# Altium PCB Rectifer.PcbDoc
Units mil, origin at the board's own origin, x right, y up, seen from the top; angles counter-clockwise.
Board outline 5250.03 x 3710.82 mil, 2 copper layers (Top Layer, Bottom Layer); 37 components, 30 nets, 104 pads, 5 vias.
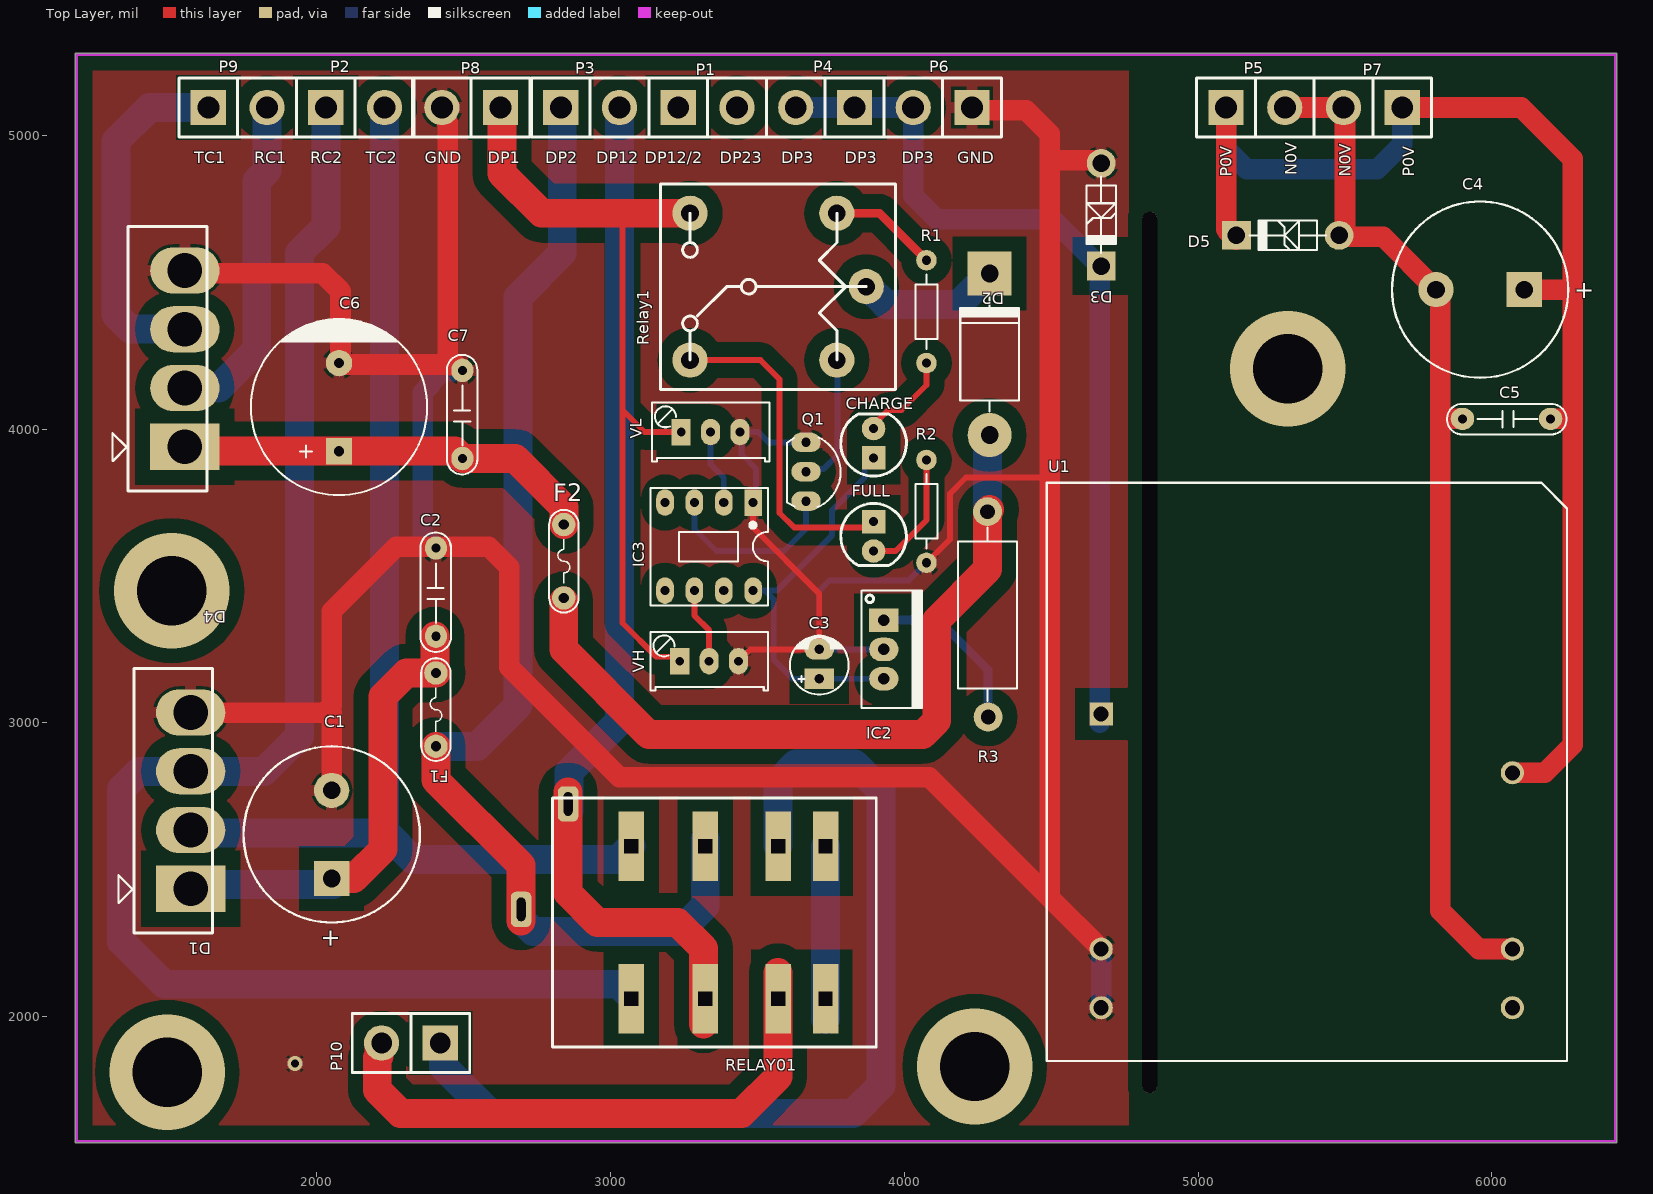
[diagram p0: Top Layer view]
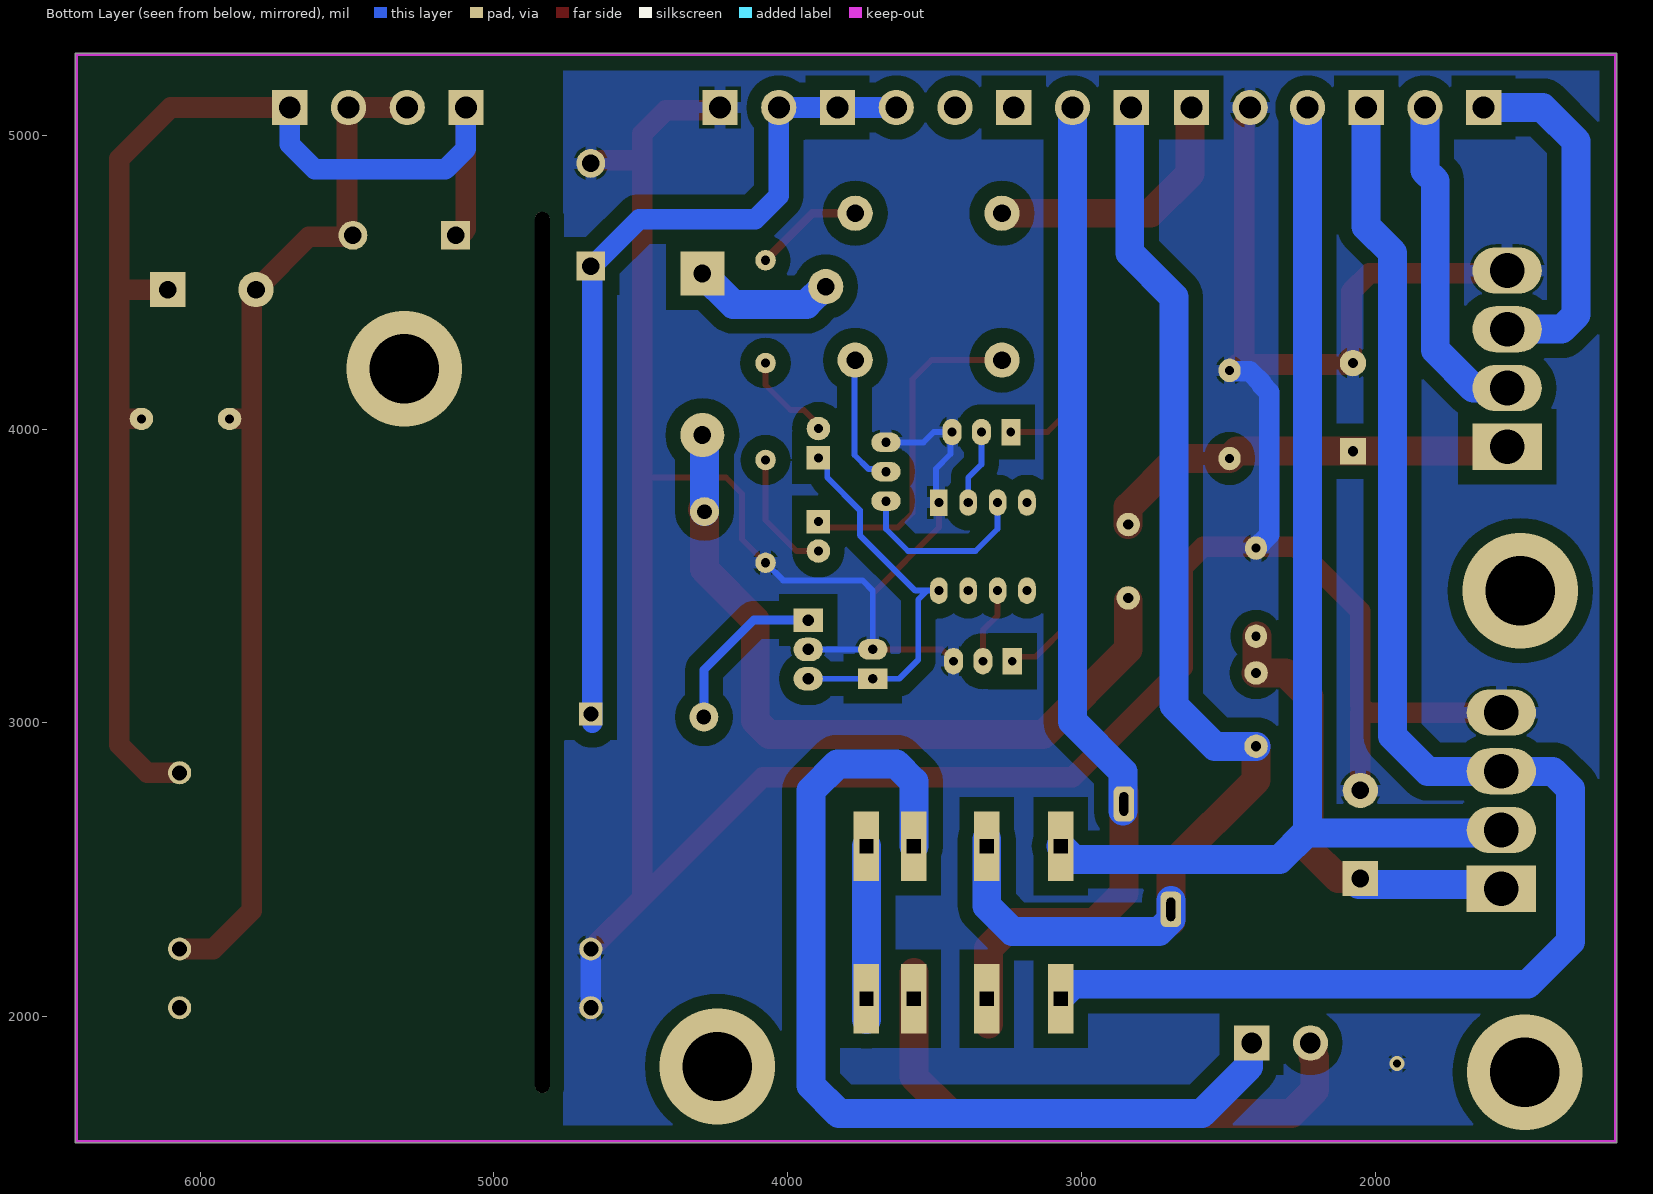
[diagram p1: Bottom Layer view, seen from below]

## Layer stack, top to bottom
Top Solder: solder mask 0.4, Solder Resist, Dk 3.5
Top Layer: signal copper 1.4
Dielectric 1: dielectric 12.6, FR-4, Dk 4.8
Bottom Layer: signal copper 1.4
Bottom Solder: solder mask 0.4, Solder Resist, Dk 3.5

## Board outline
1181.1,1569.79 cw(c1181.1,1574.8) 1176.09,1574.8 1176.09,5275.59 cw(c1181.1,5275.59) 1181.1,5280.61 6417.32,5280.61 cw(c6417.32,5275.59) 6419.21,5280.24 cw(c6421.1,5275.59) 6426.12,5275.59 6426.12,1574.8 cw(c6421.1,1574.8) 6419.21,1570.16 cw(c6417.32,1574.8) 6417.32,1569.79

## Design rules (kind name [scope] priority, off if disabled: settings)
Clearance [All] p1: gap=50 ignorepadtopadclearanceinfootprint=FALSE
PlaneConnect [All] p1: planeconnectstyle=Relief reliefexpansion=20 reliefentries=4 reliefconductorwidth=39.37 reliefairgap=10
PolygonConnect [All] p1: connectstyle=Relief reliefconductorwidth=39.37 reliefentries=4 polygonreliefangle="90 Angle" airgapwidth=10
RoutingVias [All] p1: holewidth=28 width=50 viastyle="Through Hole" minholewidth=28 minwidth=50 maxholewidth=28 maxwidth=50
SolderMaskExpansion [All] p1: expansion=4 istentingtop=FALSE
Width [All] p1: maxlimit=100 minlimit=10 preferedwidth=30
29 further rules are at their usual default settings.

## Components (designator, comment, footprint, x,y, rotation, side; value= is the part's Value field where it differs from the comment)
C1 "1000uF/25" RB7.6-15 2050,2620 r270 top value=100pF
C2 "104" CN3 2405,3445 r270 top value=0,047uF
C3 "10uF" CP1/2 3710,3150 r90 top value=10uF/50V
C4 "1000uF/25" RB7.6-15 5960,4475 r0 top value=100pF
C5 "104" CN3 6050,4035 r0 top value=0,047uF
C6 "1000uF/25" CP3/7 2075,3925 r90 top value=100pF
C7 "104" CN3 2495,4050 r270 top value=0,047uF
CHARGE "SAC" "Led don" 3895,3902 r90 top (schematic designator Led1)
D1 "Bridge2" KBU1010 1570,2435 r270 top
D2 "1N5408" D5A 4290,4530 r270 top
D3 "D Zener" DZ1A 4670,4905 r90 top
D4 "Bridge2" KBU1010 1550,3940 r270 top
D5 "15V" DZ1A 5480,4660 r0 top
F1 "F1A" Fuse 2405,3169 r270 top value=Fuse
F2 "F2A" Fuse 2840.46,3674.27 r270 top value=Fuse
FULL "FULL" "Led don" 3895,3685 r270 top (schematic designator Led2)
IC2 "LM7812" QTO-220 3930,3350 r270 top value=LM7805
IC3 "LM555" DIP8/W0.3 3485,3750 r180 top
P1 "Header 2" "CON2 5.08"#1 3230,5095 r0 top
P2 "Header 2" "CON2 5.08"#1 2030,5095 r0 top
P3 "Header 2" "CON2 5.08"#1 2830,5095 r0 top
P4 "Header 2" "CON2 5.08"#1 3830,5095 r180 top
P5 "Header 2" "CON2 5.08"#1 5095,5095 r0 top
P6 "Header 2" "CON2 5.08"#1 4230,5095 r180 top
P7 "Header 2" "CON2 5.08"#1 5695,5095 r180 top
P8 "Header 2" "CON2 5.08"#1 2625,5095 r180 top
P9 "Header 2" "CON2 5.08"#1 1630,5095 r0 top
P10 "Header 2" "CON2 5.08"#2 2420,1910 r180 top
Q1 "C2383" QTO-92 3665,3855 r270 top value=C1815
R1 "100" R1/4W 4075,4575 r270 top value="R1/4W - 1K"
R2 "2K" R1/4W 4075,3545 r90 top value="R1/4W - 1K"
R3 "5/2W" R2W 4283,3719 r270 top value="R2W - 47"
RELAY01 "DPDT 8 Pin Terminals Relay" "DPDT 8 Pin Terminals Relay" 3070,2060.32 r270 top
Relay1 "relay" Relay1 3770,4735 r270 top
U1 "PP15" PP15 4670,3030 r0 top
VH "10K" VR1 3235,3210 r0 top value="VR 10K"
VL "10K" VR1 3240,3990 r0 top value="VR 10K"

## Footprints (in the part's own frame and the unit in brackets; to place one, negate y for a bottom-side part, rotate by r counter-clockwise, add the part's x,y. Pads: shape width x height; smd on the part's side, far side on the other; paste and mask are expansions set on the pad)
CN3 [mil] "Cap np W 0.3"
  oval 80x75 hole 31: 1(-150,0) 2(150,0)
  silkscreen extent -203,-53 204,51, body extent -158,-40 158,54, height 419
"CON2 5.08"#1 [mil]
  rect 120x120 hole 74.8: 1(0,0)
  round 120 hole 74.8: 2(200,0)
  silkscreen extent -100,-100 300,100
"CON2 5.08"#2 [mil]
  rect 120x120 hole 70: 1(0,0)
  round 120 hole 70: 2(200,0)
  silkscreen extent -100,-100 300,100
CP1/2 [mil] "Tu hoa < 22uF/16>50V"
  rect 70x100 hole 32: 1(0,0)
  oval 70x100 hole 32: 2(100,0)
  silkscreen extent -53,-100 146,100, body extent -49,-99 149,99, height 287
CP3/7 [mil] "Tu hoa 4700uF/25V"
  rect 90x90 hole 35: 1(0,0)
  round 90 hole 35: 2(300,0)
  silkscreen extent -150,-300 450,300
D5A [mil] "Diode 5A, W 200mil, L 550mil"
  round 150 hole 60: 1(550,0)
  rect 150x150 hole 60: 2(0,0)
  silkscreen extent 80,-100 470,100, body extent -52,-106 590,103, height 254
DIP8/W0.3 [mil] "8 PIN, W 300mil, Pin to pin 100mil"
  rect 60x90 hole 31: 1(0,0)
  oval 60x90 hole 31: 2(100,0) 3(200,0) 4(300,0) 5(300,300) 6(200,300) 7(100,300) 8(0,300)
  silkscreen extent -50,-50 350,350, body extent -50,-40 350,336, height 201
"DPDT 8 Pin Terminals Relay" [mm]
  rect 6x2.2 hole 1.2 square: 1(0,0) 2(0,6.4) 3(0,12.7) 4(0,16.8) 5(-13.2,16.8) 6(-13.2,12.7) 7(-13.2,6.4) 8(-13.2,0)
  silkscreen extent -17.37,-6.8 4.15,21.18, body extent -17.37,-6.83 4.15,21.18, height 35
DZ1A [mm] "Diode 1A, W 100mil, L 350mil"
  round 2.5 hole 1.5: 1(0,0)
  rect 2.5x2.5 hole 1.5: 2(-8.89,0)
  silkscreen extent -7.75,-1.27 -1.14,1.27, body extent -8.79,-1.65 -0.38,1.02, height 3.06
Fuse [mil]
  round 80 hole 35: 1(-1,0) 2(249,0)
  silkscreen extent -51,-50 299,50
KBU1010 [mm] "Bridge rectifier 10A"
  rect 4x6 hole 3: 1(0,0)
  oval 4x6 hole 3: 2(-5.08,0) 3(-10.16,0) 4(-15.24,0)
  silkscreen extent -19.05,-6.25 3.81,1.9, body extent -19.05,-4.9 3.84,1.91, height 19
"Led don" [mil] "led don"
  rect 80x80 hole 30: 1(0,0)
  round 80 hole 30: 2(100,0)
  silkscreen extent -62,-112 150,112
PP15 [mm]
  rect 2x2 hole 1.3: 1(0,0)
  round 2 hole 1.3: 2(0,-20.32) 3(0,-25.4) 4(35.56,-25.4) 5(35.56,-20.32) 6(35.56,-5.08)
  silkscreen extent -4.72,-30 40.28,20, body extent -4.14,-29.91 40.92,20.05, height 8
QTO-92 [mil] "TO-92"
  oval 66x100 hole 32: 1(-100,0) 2(0,0) 3(100,0)
  silkscreen extent -117,-65 120,118, body extent -109,-66 109,95, height 245
QTO-220 [mil] "TO-220 - 1-2-3"
  rect 80x100 hole 39: 1(0,0)
  oval 80x100 hole 39: 2(100,0) 3(200,0)
  silkscreen extent -100,-76 300,130, body extent -119,-64 322,121, height 755
R1/4W [mil] "R 1/4W, 2 Pin, 350mil"
  round 70 hole 31: 1(0,0) 2(350,0)
  silkscreen extent 48,-38 302,38, body extent -40,-47 386,47, height 111
R2W [mm] "R2W, 2 pin, 700mil"
  round 2.5 hole 1.27: 1(0,0) 2(17.755,0.051)
  silkscreen extent 1.37,-2.57 16.38,2.54, body extent -2.36,-3.33 19.84,3.27, height 8.3
RB7.6-15 [mil] "Polarized Capacitor (Radial); 2 Leads"
  rect 120x120 hole 60: 1(150,0)
  round 120 hole 60: 2(-150,0)
  silkscreen extent -300,-300 300,300
Relay1 [mil]
  round 120 hole 60: 1(250,100) 2(500,-500) 3(0,-500) 4(0,0) 5(500,0)
  silkscreen extent -100,-600 600,200
VR1 [mil] "Variable Resistor"
  rect 65x90 hole 30: 1(0,0)
  oval 65x90 hole 30: 2(100,0) 3(200,0)
  silkscreen extent -100,-100 301,100, body extent -88,-130 287,110, height 455

## Part data
C1 C4 C6: library part "Cap Pol1", "Polarized Capacitor (Radial)", LatestRevisionDate=17-Jul-2002, LatestRevisionNote="Re-released for DXP Platform.", PackageDescription="Polarized Capacitor (Radial); 2 Leads", PackageReference=RB7.6-15, Published=8-Jun-2000, Publisher="Altium Limited"
C2 C5 C7: library part CN3, "Cap np W0.3", Copyright=VanDungEvn
C3: library part CAP-HOA, "Cap P  0,1uF < 22uF , 16 - 50V", Description 1="10 => 220uF/6,3V/10V - 10uF => 100uF/16V", Description 2="0,1uF => 33uF/50V - 10uF => 22uF/63V", Description 3="0,47uF => 10uF/100V"
CHARGE FULL: library part "led don"
D1 D4: "Diode Bridge", LatestRevisionDate=17-Jul-2002, LatestRevisionNote="Re-released for DXP Platform.", PackageDescription="Bridge Rectifier; 4 Terminals; Body 16.8 x 16.8 mm (typ); Pitch 10.67 mm", PackageReference=D-46_6A, Published=24-Mar-1999, Publisher="Altium Limited"
D2: library part D5A, "Diode 5A"
D3: "Zener Diode", LatestRevisionDate=17-Jul-2002, LatestRevisionNote="Re-released for DXP Platform.", PackageDescription="Diode, Thru-Hole; 2 Leads; 0.7 in Pin Spacing", PackageReference=DIODE-0.7, Published=8-Jun-2000, Publisher="Altium Limited"
D5: library part "D Zener", "Zener Diode", LatestRevisionDate=17-Jul-2002, LatestRevisionNote="Re-released for DXP Platform.", PackageDescription="Diode, Thru-Hole; 2 Leads; 0.7 in Pin Spacing", PackageReference=DIODE-0.7, Published=8-Jun-2000, Publisher="Altium Limited"
F1 F2: library part Fuse, "Fuse", Designed by=VanDungEvn
IC2: library part LM78xx, "On ap +, from + 5 to + 24VDC"
IC3: "Timer"
P1 P2 P3 P4 P5 P6 P7 P8 P9 P10: "Header, 2-Pin", LatestRevisionDate=17-Jul-2002, LatestRevisionNote="Re-released for DXP Platform.", Publisher="Altium Limited"
Q1: library part NPN_ECB, "P 600mW, ECB"
R1 R2: library part R, "Resistor 1/4W"
R3: library part R2W, "Resistor 2W"
Relay1: library part Relay, "SPDT Relay", LatestRevisionDate=17-Jul-2002, LatestRevisionNote="Re-released for DXP Platform.", PackageReference=MODULE5B, Published=8-Jun-2000, Publisher="Altium Limited"
VH VL: library part VR1, "Var Resistor"

## Free pads (board coordinates)
  oval 50x3000 hole 50 slot 3000 at 90 deg unplated: 2(4835,3240)
  rrect50% 70x120 hole 30 slot 80 at 90 deg: 3(2695,2365) 3(2855,2723.97)

## Via types
v1: diameter 393.7, hole 236.22, Top Layer to Bottom Layer, 4 vias
v2: diameter 50, hole 28, Top Layer to Bottom Layer, 1 vias

## Nets (pads, with @x,y where several pads share a name; then routed paths per layer and width w, separated by ;. In a path a pad name is that pad's centre, name@x,y a point inside that pad or via, vN(x,y) a via of type N, cw(c..) or ccw(c..) an arc to the next point about the centre after c; other vN are vias at no path point)
12V: C3.1 CHARGE.1 IC2.3 IC3.8 | length 1331
  Bottom Layer w20: IC3.8 3525,3450 ; CHARGE.1@3895,3915 3865,3885 3865,3835 3754,3724 3754,3639 3565,3450 3525,3450 ; IC2.3 C3.1 3620,3150 3555,3215 3555,3420 3525,3450
DP1: P8.1 Relay1.3 VH.1 VL.1 | length 2800.8
  Top Layer w19.68: 3040,4735 3040,4065 ; VH.1@3240,3210 VH.1 3220,3225 3155,3225 3040,3340 3040,4065 ; VL.1 3115,3990 3040,4065
  Top Layer w98.43: P8.1@2630,5095 2630,4870 2765,4735 3040,4735 Relay1.3
DP2: F1.2 P3.1 pad.3@2695,2365 RELAY01.7 | length 4122.8
  Top Layer w98.43: F1.2 2405,2805 2695,2515 2695,2365 pad.3@2695,2325
  Bottom Layer w98.43: F1.2 2545,2920 2685,3060 2685,4450 2835,4600 P3.1@2835,5095 ; pad.3@2695,2395 2695,2330 2707.5,2317.5 2735,2290 3235,2290 3321.97,2376.97 RELAY01.7 RELAY01.7@3321.97,2605
DP3: D3.2 P4.1 P4.2 P6.2 U1.1 | length 2989.4
  Bottom Layer w70: P4.2 P4.1 P6.2 4030,4795 4110,4715 4505,4715 4665,4555 U1.1@4665,3000
DP12: P3.2 pad.3@2855,2723.97 RELAY01.2 | length 3607.2
  Top Layer w98.43: pad.3@2855,2765 2855,2723.97 2855,2420 2955,2320 3228.41,2320 3316.06,2232.34 RELAY01.2@3316.06,1975
  Bottom Layer w98.43: pad.3@2858.43,2700 2858.43,2833.43 3030,3005 3030,3085 P3.2
DP12/2: P1.1
DP23: P1.2
GND: C1.2 C2.1 C3.2 C6.2 C7.1 D1.4 D3.1 D4.4 IC2.2 IC3.1 P6.1 P8.2 Q1.1 R2.1 U1.2 U1.3 VH.3 VL.3 | length 13507.1
  Top Layer w20: VH.3 3435,3210.32 3455.79,3231.11 3456.11,3231.11 3475,3250 C3.2 3710,3440 3485,3665 IC3.1 ; R2.1 4155,3625 4155,3780 4210,3835 4490,3835 4495,3830
  Top Layer w70: D4.4 1557.65,4532.35 1585.94,4532.35 1588.28,4530 2020,4530 2080,4470 2080,4220 2445,4220 ; D1.4 2025,3035 2050,3060 2050,3380 2270,3600 2585,3600 2655,3530 2655,3190 3030,2815 4085,2815 4495,2405 ; C1.2@2050,2775 2050,3035 ; P8.2@2430,5095 2439.57,5085.43 2439.57,5050.08 2445,5044.64 2445,4220 ; C7.1@2492.5,4197.5 2470,4220 2445,4220 ; P6.1@4230,5085 4415,5085 4495,5005 4495,4915 ; U1.2 4495,2405 ; D3.1 4667.29,4905 4657.29,4915 4495,4915 ; 4495,2405 4495,3830 4495,4915
  Bottom Layer w20: IC3.1 3495,3760 3495,3865 3445,3915 3445,3985 VL.3 3502.5,3990 3537.5,3955 Q1.1 ; IC2.2 C3.2 3710,3450 3745,3485 4015,3485 R2.1
  Bottom Layer w70: C2.1 2360,3640 2360,4125 2385,4150 2385,4155.54 2426.01,4196.54 2492.69,4196.54 2495,4198.85 C7.1 ; U1.2@4667.63,2230 U1.2 U1.3
  other v2: 1925,1840
N0V: C4.2 C5.1 D5.1 P5.2 P7.2 U1.5 | length 3523.8
  Top Layer w70: P5.2 P7.2 5500,5090 5500,4655 5630,4655 C4.2 5825,4460 5825,4030 ; C5.1 5830,4035 5825,4030 ; U1.5 5955,2230 5825,2360 5825,4030
NetC1_1: C1.1 C2.2 D1.1 F1.1 | length 1561.1
  Top Layer w98.43: C1.1 2125,2470 2225,2570 2225,3090 2305,3170 F1.1 ; F1.1@2401.28,3173.43 C2.2@2401.28,3295
  Bottom Layer w98.43: D1.1@1565,2450 C1.1@2055,2450
NetC6_1: C6.1 C7.2 D4.1 F2.1 | length 1434.8
  Top Layer w98.43: D4.1 1565,3925 C6.1 2470,3925 C7.2 2675,3900 2840.46,3734.54 F2.1
NetD2_2: D2.2 Relay1.1 | length 488.3
  Bottom Layer w98.43: Relay1.1 3875.84,4485 3935.84,4425 4185,4425 D2.2
NetIC2_1: IC2.1 R3.2 | length 585.4
  Bottom Layer w30: IC2.1 4115,3350 4285,3180 R3.2
NetIC3_2: IC3.2 VL.2 | length 258.6
  Bottom Layer w20: VL.2 3340,3880 3385,3835 IC3.2
NetIC3_3: IC3.3 Q1.3 | length 627.1
  Bottom Layer w20: IC3.3 3285,3660 3360,3585 3590,3585 3665,3660 Q1.3
NetIC3_6: IC3.6 VH.2 | length 260.7
  Top Layer w20: IC3.6 3285,3365 3335,3315 VH.2
NetLed1_2: CHARGE.2 R1.2 | length 310.9
  Top Layer w20: CHARGE.2@3895,4015 3945,4065 3990,4065 4075,4150 R1.2
NetLed2_1: FULL.1 Relay1.2 | length 1136.3
  Top Layer w20: Relay1.2 3510,4235 3575,4170 3575,3714.76 3625,3664.76 3874.76,3664.76 FULL.1
NetLed2_2: FULL.2 R2.2 | length 428.5
  Top Layer w20: FULL.2 3970,3585 4075,3690 R2.2
NetP10_1: P10.1 RELAY01.6 | length 3316.9
  Bottom Layer w98.43: P10.1 2430.79,1899.21 2430.79,1829.21 2590,1670 3825,1670 3920,1765 3920,2770 3830,2860 3630,2860 3570,2800 RELAY01.6
NetP10_2: P10.2 RELAY01.3 | length 1971.1
  Top Layer w98.43: P10.2 2210.43,1900.43 2210.43,1865.08 2205,1859.64 2205,1750 2285,1670 3445,1670 3570,1795 RELAY01.3 RELAY01.3@3570,2150
NetQ1_2: Q1.2 Relay1.5 | length 454.6
  Bottom Layer w20: Q1.2 3673.8,3863.8 3723.8,3863.8 3772.24,3912.24 3772.24,4232.76 Relay1.5
NetR1_1: R1.1 Relay1.4 | length 371.3
  Top Layer w30: Relay1.4 3915,4735 R1.1
NetRELAY01_4: RELAY01.4 RELAY01.5 | length 590
  Bottom Layer w98.43: RELAY01.4@3731.42,1990 RELAY01.4 RELAY01.5
P0V: C4.1 C5.2 D5.2 P5.1 P7.1 U1.6 | length 4527.6
  Top Layer w70: P5.1 5095,4680 D5.2@5130,4645 ; P7.1 6100,5095 6275,4920 6275,4475 ; U1.6 6180,2830 6275,2925 6275,4030 ; C4.1 6275,4475 ; C5.2 6270,4035 6275,4030 ; 6275,4030 6275,4475
  Bottom Layer w70: P5.1 5095,4955 5165,4885 5610,4885 5695,4970 P7.1
RC1: D4.2 P9.2 | length 1138.3
  Bottom Layer w98.43: D4.2 1665,4140 1795,4270 1795,4845 1830,4880 P9.2
RC2: D1.3 P2.1 RELAY01.1 | length 5170.5
  Bottom Layer w98.43: P2.1 2030,4690 1940,4600 1940,2955 1820,2835 D1.3 1395,2835 1335,2775 1335,2255 1480,2110 3026.69,2110 RELAY01.1@3056.35,2080.35
TC1: D4.3 P9.1 | length 1208.3
  Bottom Layer w98.43: D4.3 1549.36,4340.64 1364.36,4340.64 1315,4390 1315,4980 1430,5095 P9.1
TC2: D1.2 P2.2 RELAY01.8 | length 4020.1
  Bottom Layer w98.43: D1.2 1577.65,2627.35 1605.94,2627.35 1608.28,2625 2235,2625 2325,2535 3025,2535 RELAY01.8 ; 2230,2635 P2.2
V_in: D2.1 F2.2 R3.1 | length 2632.2
  Top Layer w98.43: F2.2@2840,3415.54 2840,3250 3130,2960 4062.34,2960 4110,3007.66 4110,3350 4283,3523 R3.1 R3.1@4290,3726
  Bottom Layer w98.43: R3.1 4283,3973 D2.1
pads on no net: IC3.4 IC3.5 IC3.7 U1.4
copper on no net:
  other v1: 1490,1810 4239.43,1830 1505.18,3450 5305,4205

## Polygon pours and split planes (outlines as drawn)
GND on Bottom Layer "GND_L02_P002" (solid, remove dead copper, pour order 2): 1185,5275 1190.59,5269.41 4763.9,5269.41 4763.9,1579.21 4758.9,1574.21 1185,1574.21
GND on Top Layer "GND_L01_P000" (solid, remove dead copper, pour order 0): 1185,5280 1190.59,5274.41 4763.9,5274.41 4763.9,1584.21 4758.9,1579.21 1185,1579.21

## Keep-outs
Keep-Out Layer:
  lines w10: 6417.32,1574.8 1181.1,1574.8 1181.1,5275.59 6417.32,5275.59 ; 6421.1,1574.8 6421.1,5275.59

## Silkscreen, mask and mechanical layers (free items; w line width, h text height)
Top Overlay:
  text "TC1" at 1581.4,4905 h40
  text "RC1" at 1786.4,4905 h40
  text "RC2" at 1976.4,4905 h40
  text "TC2" at 2166.4,4905 h40
  text "GND" at 2366.4,4905 h40
  text "DP1" at 2581.4,4905 h40
  text "DP2" at 2776.4,4905 h40
  text "DP12" at 2951.4,4905 h40
  text "DP12/2" at 3116.4,4905 h40
  text "DP23" at 3371.4,4905 h40
  text "DP3" at 3581.4,4905 h40
  text "DP3" at 3796.4,4905 h40
  text "DP3" at 3991.4,4905 h40
  text "GND" at 4180,4905 h40
  text "N0V" at 5335,4865 h40 r90
  text "P0V" at 5115,4860 h40 r90
  text "N0V" at 5520,4860 h40 r90
  text "P0V" at 5735,4860 h40 r90

## Text inside footprints (layer, text, board x,y; h text height)
C1: Top Overlay "+" at 2020.99,2299.85 h59.06 r270
C4: Top Overlay "+" at 6280.15,4445.99 h59.06